# Altium PCB PCB_ 投板.PcbDoc
Units mm, origin at the board's own origin, x right, y up, seen from the top; angles counter-clockwise.
Board outline 25.78 x 19.56 mm, 2 copper layers (Top Layer, Bottom Layer); 14 components, 6 nets, 43 pads, 24 vias.
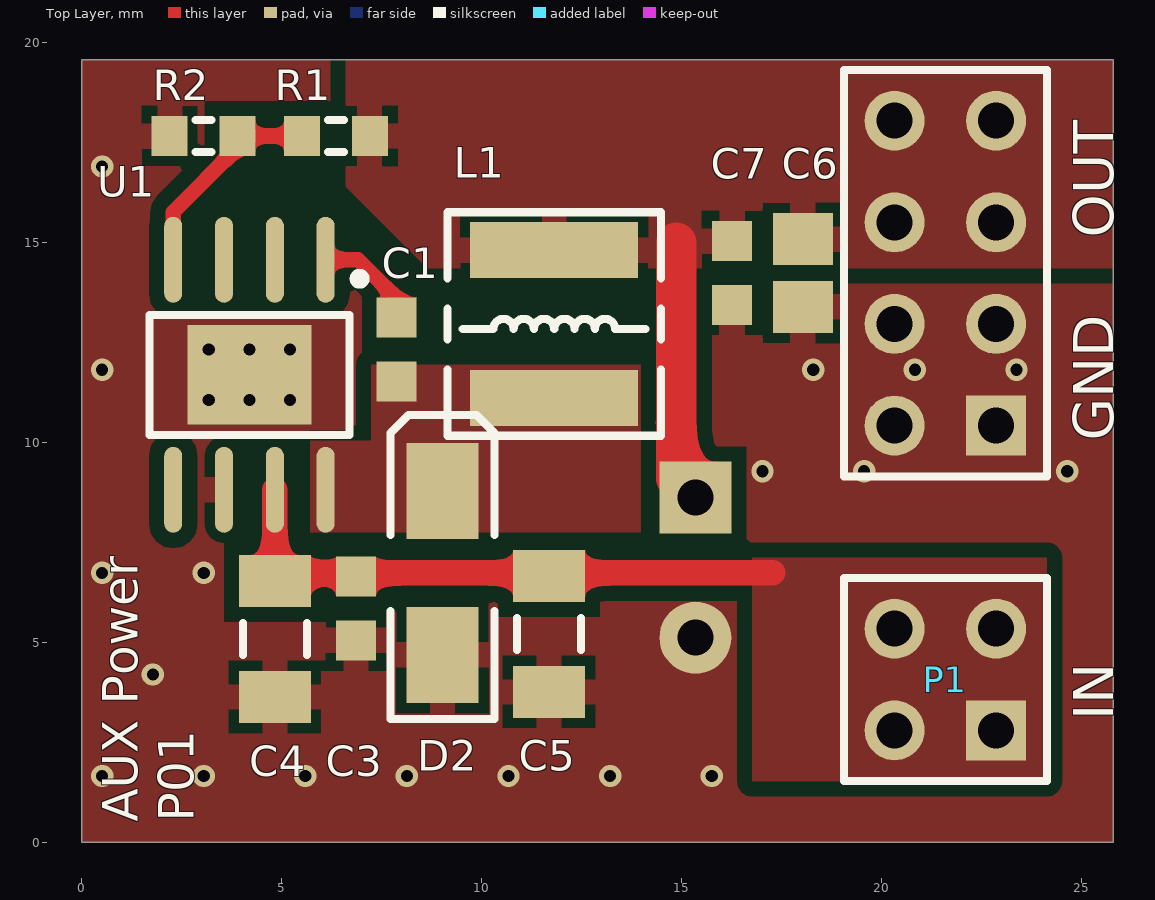
[diagram p0: Top Layer view]
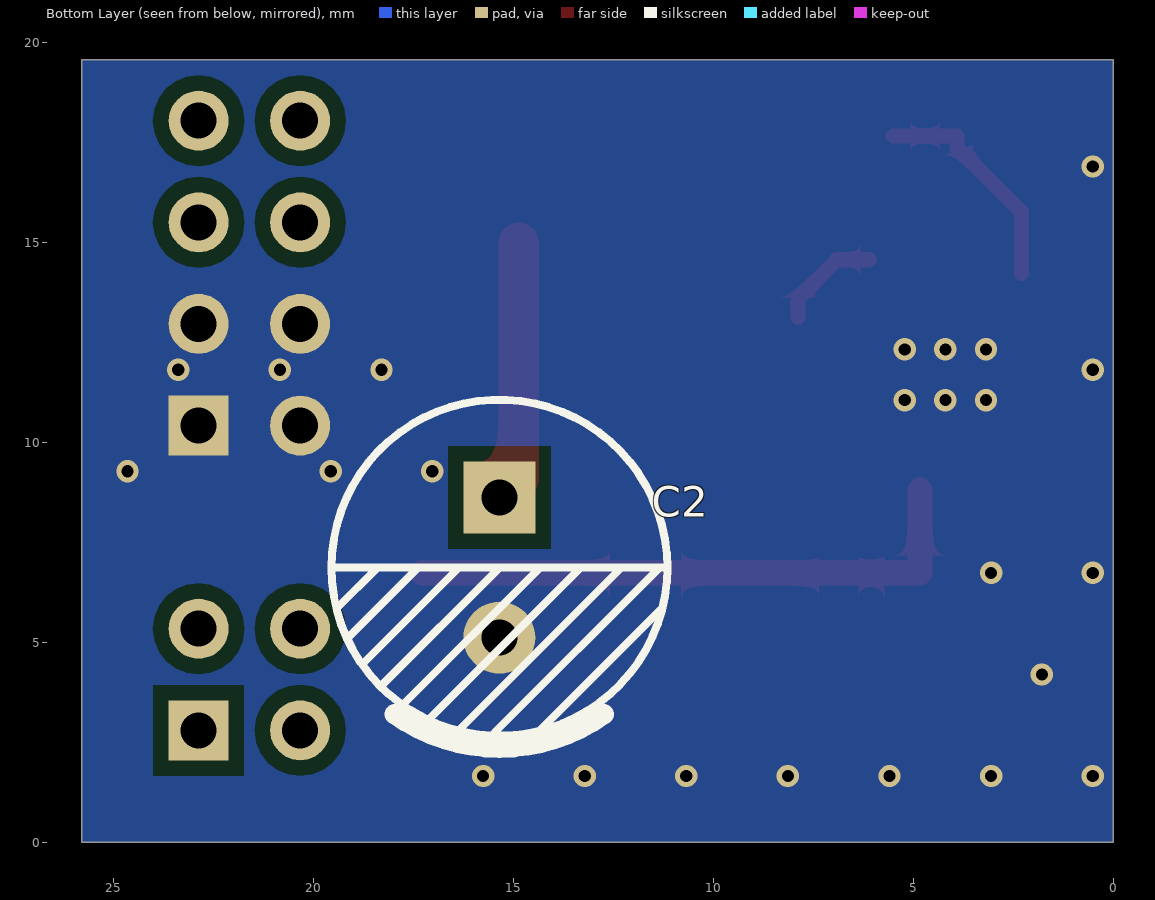
[diagram p1: Bottom Layer view, seen from below]

## Layer stack, top to bottom
Top Solder: solder mask 0.0102, Solder Resist, Dk 3.5
Top Layer: signal copper 0.0356
Dielectric 1: dielectric 0.32, FR-4, Dk 4.8
Bottom Layer: signal copper 0.0356
Bottom Solder: solder mask 0.0102, Solder Resist, Dk 3.5

## Board outline
0,0 25.781,0 25.781,19.558 0,19.558

## Design rules (kind name [scope] priority, off if disabled: settings)
Clearance Clearance_1 [InNamedPolygon('GND_L01_P625')] p1: gap=0.254 ignorepadtopadclearanceinfootprint=FALSE except(0: Arc-Hole Track-Hole SMDPad-Hole THPad-Hole Via-Hole Fill-Hole Poly-Hole Region-Hole Text-Hole)
Clearance [All] p2: gap=0.381 ignorepadtopadclearanceinfootprint=TRUE except(0.127: Fill-Text Poly-Text Region-Text)
ComponentClearance [All] p1: gap=0 collisioncheckmode=3 verticalgap=0 showdistances=FALSE
PolygonConnect PolygonConnect_2 [All vs IsNamedPolygon('GND_L01_P625')] p1: connectstyle=Direct reliefconductorwidth=0.254 reliefentries=4 polygonreliefangle="90 Angle" airgapwidth=0.254
PolygonConnect PolygonConnect_1 [All vs IsNamedPolygon('NETC1_2_L01_P590')] p2: connectstyle=Direct reliefconductorwidth=0.254 reliefentries=4 polygonreliefangle="90 Angle" airgapwidth=0.254
PolygonConnect [All] p3: thpad.connectstyle=Direct thpad.reliefconductorwidth=0.635 thpad.reliefentries=4 thpad.polygonreliefangle="90 Angle" thpad.airgapwidth=0.254 smdpad.connectstyle=Relief smdpad.reliefconductorwidth=0.635 smdpad.reliefentries=4 smdpad.polygonreliefangle="90 Angle" smdpad.airgapwidth=0.254 via.connectstyle=Direct via.reliefconductorwidth=0.635 via.reliefentries=4 via.polygonreliefangle="90 Angle" via.airgapwidth=0.254
RoomDefinition Sch [InComponentClass('Sch')] p1: confinementstyle=ConfineIn formatcopy=TRUE lockcomponents=FALSE outline -15.113,-49.149 100.457,-49.149 100.457,50.927 -15.113,50.927
RoutingVias [All] p1: holewidth=0.711 width=1.27 viastyle="Through Hole" minholewidth=0.711 minwidth=1.27 maxholewidth=0.711 maxwidth=1.27
SolderMaskExpansion [All] p1: expansion=0.102
Width [All] p1: maxlimit=1.016 minlimit=0.254 preferedwidth=0.254
29 further rules are at their usual default settings.

## Classes and differential pairs
component class Sch: C1 C2 C3 C4 C5 C6 C7 D2 L1 R1 R2 U1

## Components (designator, comment, footprint, x,y, rotation, side; value= is the part's Value field where it differs from the comment)
C1 "10nF" CAP1608(0603) 7.874,12.319 r270 top
C2 "220uF/10V" "CAP 3.5*8*11.5" 15.342,6.861 r270 bottom
C3 "10nF" CAP1608(0603) 6.858,5.842 r270 top
C4 "4.7uF" CAPC3216N 4.826,5.08 r270 top
C5 "4.7uF" CAPC3216N 11.684,5.207 r270 top
C6 "100nF" CAPC2012N 18.034,14.224 r270 top
C7 "100nF" CAPC1608N 16.256,14.224 r270 top
D2 "SS14" DIODE_SMA 9.017,6.731 r180 top
L1 "Inductor" NR5012 11.811,12.954 r90 top value=47uH
P1 "Header 2X2" HDR2X2 22.86,2.794 r90 top
P2 "Header 4X2" HDR2X4 22.86,10.414 r90 top
R1 "10k" RES1608(0603) 6.35,17.653 r0 top
R2 "3.16k" RES1608(0603) 3.048,17.653 r0 top
U1 "TPS5450" TPS5450 4.191,11.684 r270 top

## Footprints (in the part's own frame and the unit in brackets; to place one, negate y for a bottom-side part, rotate by r counter-clockwise, add the part's x,y. Pads: shape width x height; smd on the part's side, far side on the other; paste and mask are expansions set on the pad)
CAP1608(0603) [mm]
  rect 1x1 smd: 1(-0.8,0) 2(0.8,0)
  body extent -0.87,-0.48 0.87,0.48, height 0.85
"CAP 3.5*8*11.5" [mm] "脚距3.5mm直径8mm高度11.5mm"
  rect 1.8x1.8 hole 0.9: 1(-1.75,0)
  round 1.8 hole 0.9: 2(1.75,0)
  silkscreen extent -4.2,-4.2 4.5,4.2, body extent -4,-4 4.01,4, height 11.53
CAPC1608N [mm] "Chip Capacitor, Body 1.6x0.8mm, IPC Medium Density"
  rect 1x1 smd: 1(-0.8,0) 2(0.8,0)
  body extent -0.87,-0.48 0.87,0.48, height 0.85
CAPC2012N [mm] "Chip Capacitor, Body 2.0x1.3mm, IPC Medium Density"
  rect 1.3x1.5 smd: 1(-0.85,0) 2(0.85,0)
  body extent -1.1,-0.72 1.1,0.72, height 1.1
CAPC3216N [mm] "Chip Capacitor, Body 3.2x1.6mm, IPC Medium Density"
  rect 1.3x1.8 smd: 1(-1.45,0) 2(1.45,0)
  silkscreen extent -0.4,-0.8 0.4,0.8, body extent -1.7,-0.9 1.7,0.9, height 1.35
DIODE_SMA [mm]
  rect 1.8x2.4 smd: 1(0,2.05) 2(0,-2.05)
  silkscreen extent -1.3,-3.95 1.3,3.65
HDR2X2 [mm] "Connector; Header; 2x2 Position"
  rect 1.5x1.5 hole 0.9: 1(0,0)
  round 1.5 hole 0.9: 2(0,2.54) 3(2.54,0) 4(2.54,2.54)
  silkscreen extent -1.27,-1.27 3.81,3.81
HDR2X4 [mm] "Connector; Header; 4x2 Position"
  rect 1.5x1.5 hole 0.9: 1(0,0)
  round 1.5 hole 0.9: 2(0,2.54) 3(2.54,0) 4(2.54,2.54) 5(5.08,0) 6(5.08,2.54) 7(7.62,0) 8(7.62,2.54)
  silkscreen extent -1.27,-1.27 8.89,3.81
NR5012 [mm] "5.0mm*5.0mm*1.2mm(长*宽*高）"
  rect 1.4x4.2 smd: 1(-1.85,0) 2(1.85,0)
  silkscreen extent -2.79,-2.67 2.79,2.67, body extent -2.5,-2.5 2.5,2.5, height 1.3
RES1608(0603) [mm]
  rect 0.9x1 smd: 1(-0.85,0) 2(0.85,0)
  silkscreen extent -0.2,-0.4 0.2,0.4, body extent -0.85,-0.48 0.85,0.48, height 0.6
TPS5450 [mm]
  oval 2.15x0.45 smd: 1(-2.875,1.905) 2(-2.875,0.635) 3(-2.875,-0.635) 4(-2.875,-1.905) 5(2.875,-1.905) 6(2.875,-0.635) 7(2.875,0.635) 8(2.875,1.905)
  rect 2.49x3.1 smd: 9(0,0)
  silkscreen extent -2.52,-2.5 1.5,2.88, body extent -2.4,-2.5 2.4,2.5, height 1.75

## Part data
C1 C3 C4 C5 C6 C7: library part Cap, "Capacitor", LatestRevisionDate=17-Jul-2002, LatestRevisionNote="Re-released for DXP Platform.", PackageDescription="Radial Cap, Thru-Hole; 2 Leads; 0.3 in Pin Spacing", PackageReference=RAD-0.3, Published=8-Jun-2000, Publisher="Altium Limited"
C2: library part "Cap Pol1", "Polarized Capacitor (Radial)", LatestRevisionDate=17-Jul-2002, LatestRevisionNote="Re-released for DXP Platform.", PackageDescription="Polarized Capacitor (Radial); 2 Leads", PackageReference=RB7.6-15, Published=8-Jun-2000, Publisher="Altium Limited"
D2: library part "D Schottky", "Schottky Diode", Code_JEDEC=DO-214-AA, LatestRevisionDate=17-Jul-2002, LatestRevisionNote="Re-released for DXP Platform.", PackageDescription="DO-214-AA/SMB; 2 C-Bend Leads; Body 5.3 x 3.6 mm, inc. leads (LxW)", PackageReference=SMB, Published=8-Jun-2000, Publisher="Altium Limited"
P1: "Header, 2-Pin, Dual row", LatestRevisionDate=17-Jul-2002, LatestRevisionNote="Re-released for DXP Platform.", Publisher="Altium Limited"
P2: "Header, 4-Pin, Dual row", LatestRevisionDate=17-Jul-2002, LatestRevisionNote="Re-released for DXP Platform.", Publisher="Altium Limited"
R1 R2: library part Res1, "Resistor", LatestRevisionDate=17-Jul-2002, LatestRevisionNote="Re-released for DXP Platform.", PackageDescription="Axial Device, Thru-Hole; 2 Leads; 0.3 in Pin Spacing", PackageReference=AXIAL-0.3, Published=8-Jun-2000, Publisher="Altium Limited"
L1: Code_IEC=1005, Code_JEITA=0402, LatestRevisionDate=29-May-2009, LatestRevisionNote="IPC-7351 Footprint Added.", PackageDescription="Chip Inductor", PackageReference=0402-A, Published=8-Jun-2000, Publisher="Altium Limited"

## Via types
v1: diameter 0.559, hole 0.305, Top Layer to Bottom Layer, 24 vias

## Nets (pads, with @x,y where several pads share a name; then routed paths per layer and width w, separated by ;. In a path a pad name is that pad's centre, name@x,y a point inside that pad or via, vN(x,y) a via of type N, cw(c..) or ccw(c..) an arc to the next point about the centre after c; other vN are vias at no path point)
GND: C2.2 C3.2 C4.2 C5.2 C6.2 C7.2 D2.1 P2.1 P2.2 P2.3 P2.4 R2.1 U1.6 U1.9
  other v1: 0.508,1.651 3.048,1.651 5.588,1.651 8.128,1.651 10.668,1.651 13.208,1.651 15.748,1.651 1.778,4.191 0.508,6.731 3.048,6.731 17.018,9.271 19.558,9.271 24.638,9.271 3.175,11.049 4.191,11.049 5.207,11.049 0.508,11.811 18.288,11.811 20.828,11.811 23.368,11.811 3.175,12.319 4.191,12.319 5.207,12.319 0.508,16.891
NetC1_1: C1.1 U1.1 | length 2.6
  Top Layer w0.381: U1.1 6.904,14.559 7.874,13.589 C1.1
NetC1_2: C1.2 D2.2 L1.1 U1.8
NetR1_1: R1.1 R2.2 U1.4 | length 5.7
  Top Layer w0.381: U1.4@2.286,14.221 U1.4 2.286,15.748 3.898,17.36 R2.2 R1.1
VIN: C3.1 C4.1 C5.1 P1.1 P1.2 P1.3 P1.4 U1.7 | length 14.5
  Top Layer w0.635: U1.7 4.826,6.731 11.684,6.731 17.272,6.731
VOUT: C2.1 C6.1 C7.1 L1.2 P2.5 P2.6 P2.7 P2.8 R1.2 | length 6.6
  Top Layer w1.016: 14.859,14.986 14.859,9.093 C2.1
pads on no net: U1.2 U1.3 U1.5

## Polygon pours and split planes (outlines as drawn)
GND on Top Layer "GND_L01_P627" (solid, remove dead copper, pour order 627): 25.781,19.558 25.781,0 25.4,0 0,0 0,19.558
GND on Top Layer "GND_L01_P625" (solid, remove dead copper, pour order 625): 1.651,10.287 6.731,10.287 6.731,13.106 1.651,13.106
VOUT on Top Layer "VOUT_L01_P621" (solid, remove dead copper, pour order 621): 25.781,19.558 25.781,14.351 8.636,14.351 6.604,16.383 6.604,19.558
VIN on Top Layer "VIN_L01_P619" (solid, remove dead copper, pour order 619): 16.764,7.112 16.764,1.524 24.13,1.524 24.13,7.112
NetC1_2 on Top Layer "NETC1_2_L01_P590" (solid, remove dead copper, pour order 590): 5.715,10.033 5.715,7.747 13.97,7.747 13.97,11.938 9.398,11.938 7.239,11.938 7.239,10.033
GND on Bottom Layer "GND_L02_P629" (solid, remove dead copper, pour order 629): 25.781,19.558 25.781,0 0,0 0,19.558

## Silkscreen, mask and mechanical layers (free items; w line width, h text height)
Top Overlay:
  text "OUT" at 25.781,15.113 h1 r90
  text "GND" at 25.781,10.033 h1 r90
  text "IN" at 25.781,3.048 h1 r90
  text "AUX Power" at 1.397,0.508 h0.89 r90
  text "P01" at 2.794,0.508 h0.89 r90
Mechanical 1:
  the board outline again, w0.254